# Altium PCB PCB1.PcbDoc
Units mil, origin at the board's own origin, x right, y up, seen from the top; angles counter-clockwise.
Board outline 1970 x 2514.84 mil, 2 copper layers (Top Layer, Bottom Layer); 20 components, 11 nets, 47 pads, 1405 vias.
Unrouted connection lines stored in the file: 16.
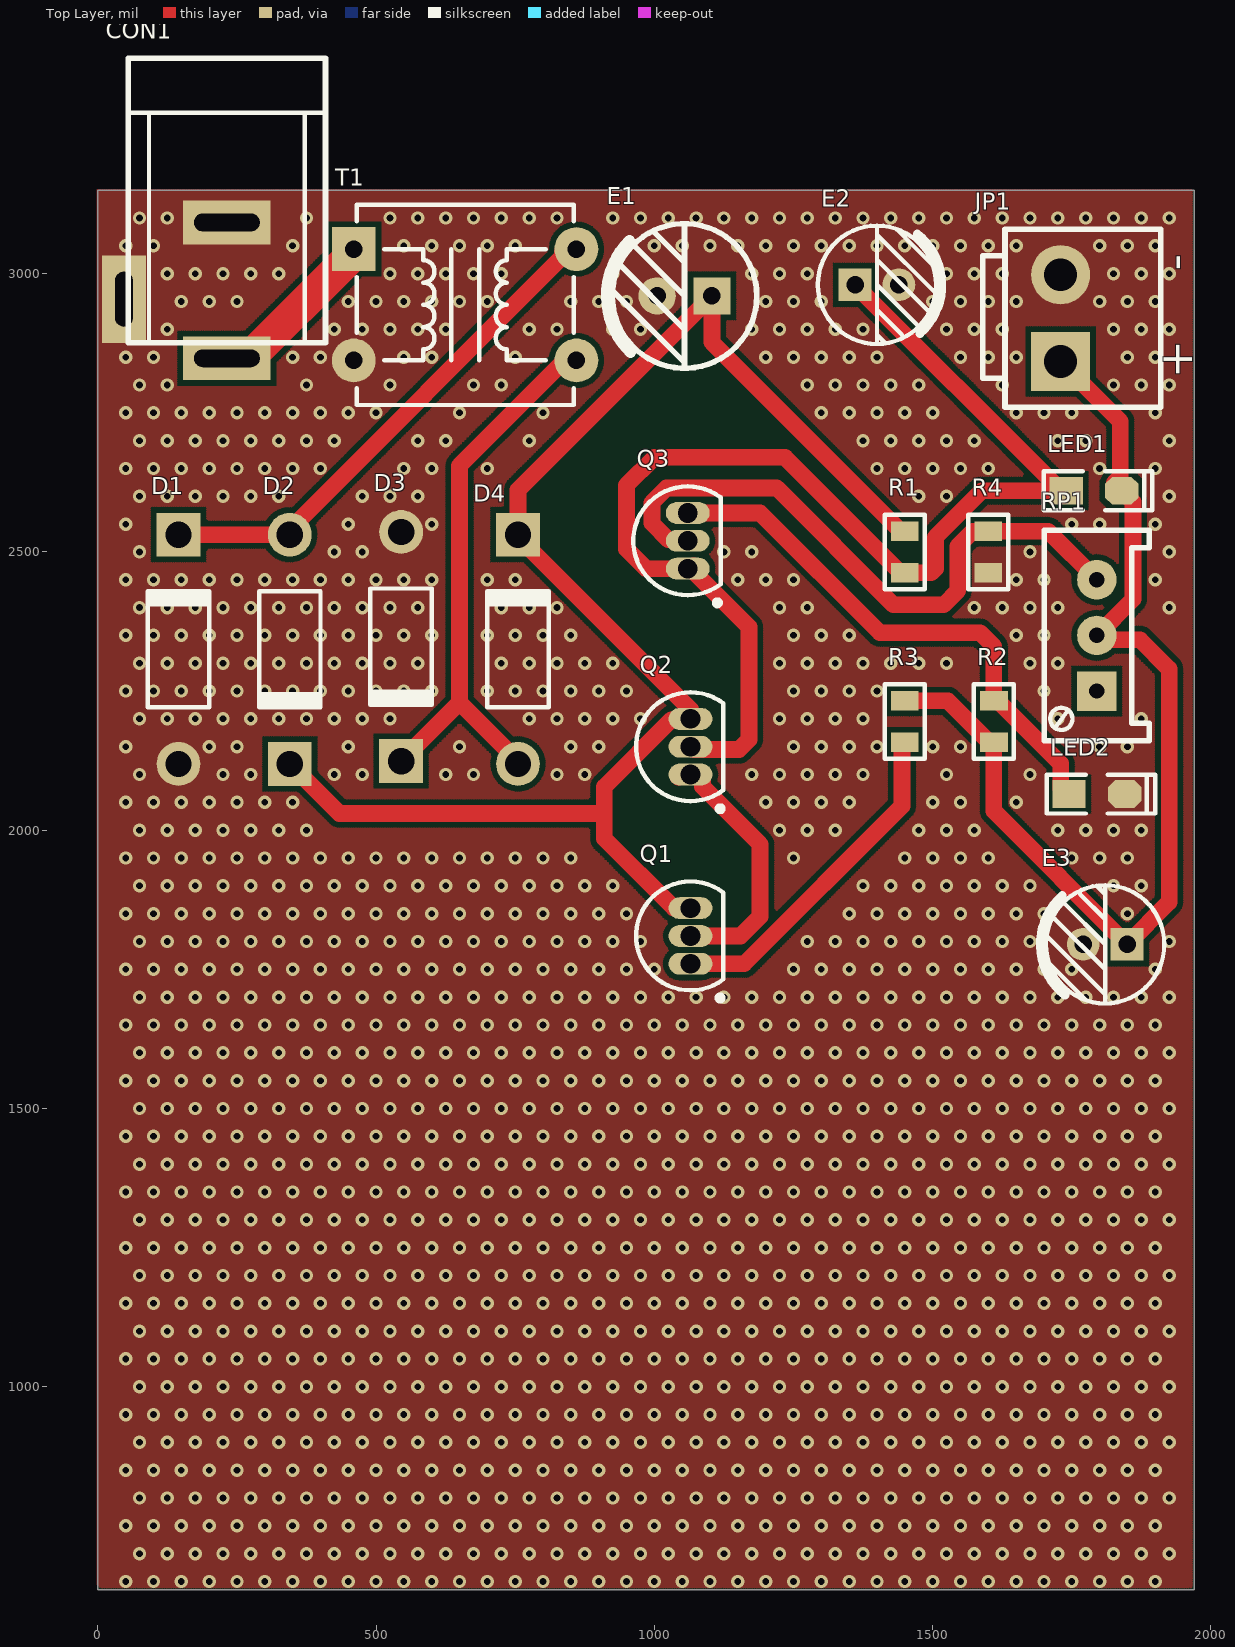
[diagram p0: Top Layer view]
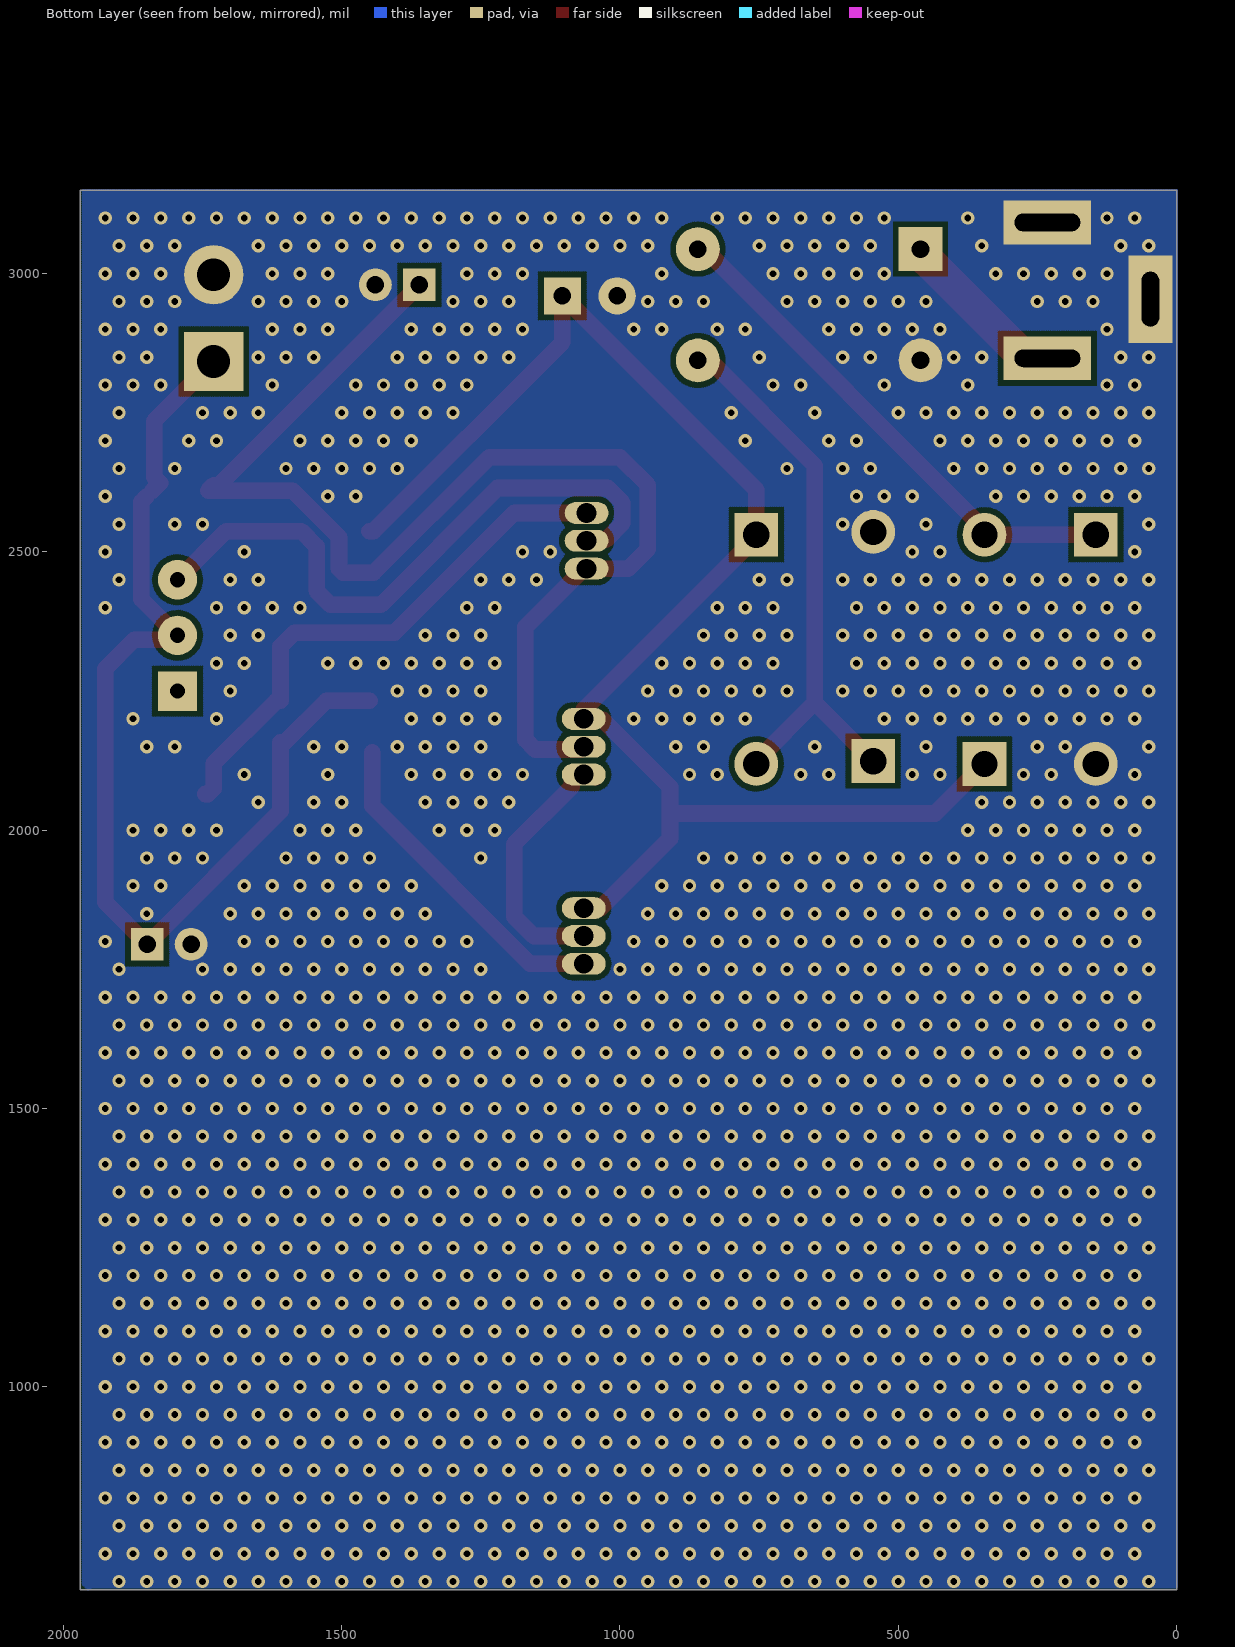
[diagram p1: Bottom Layer view, seen from below]
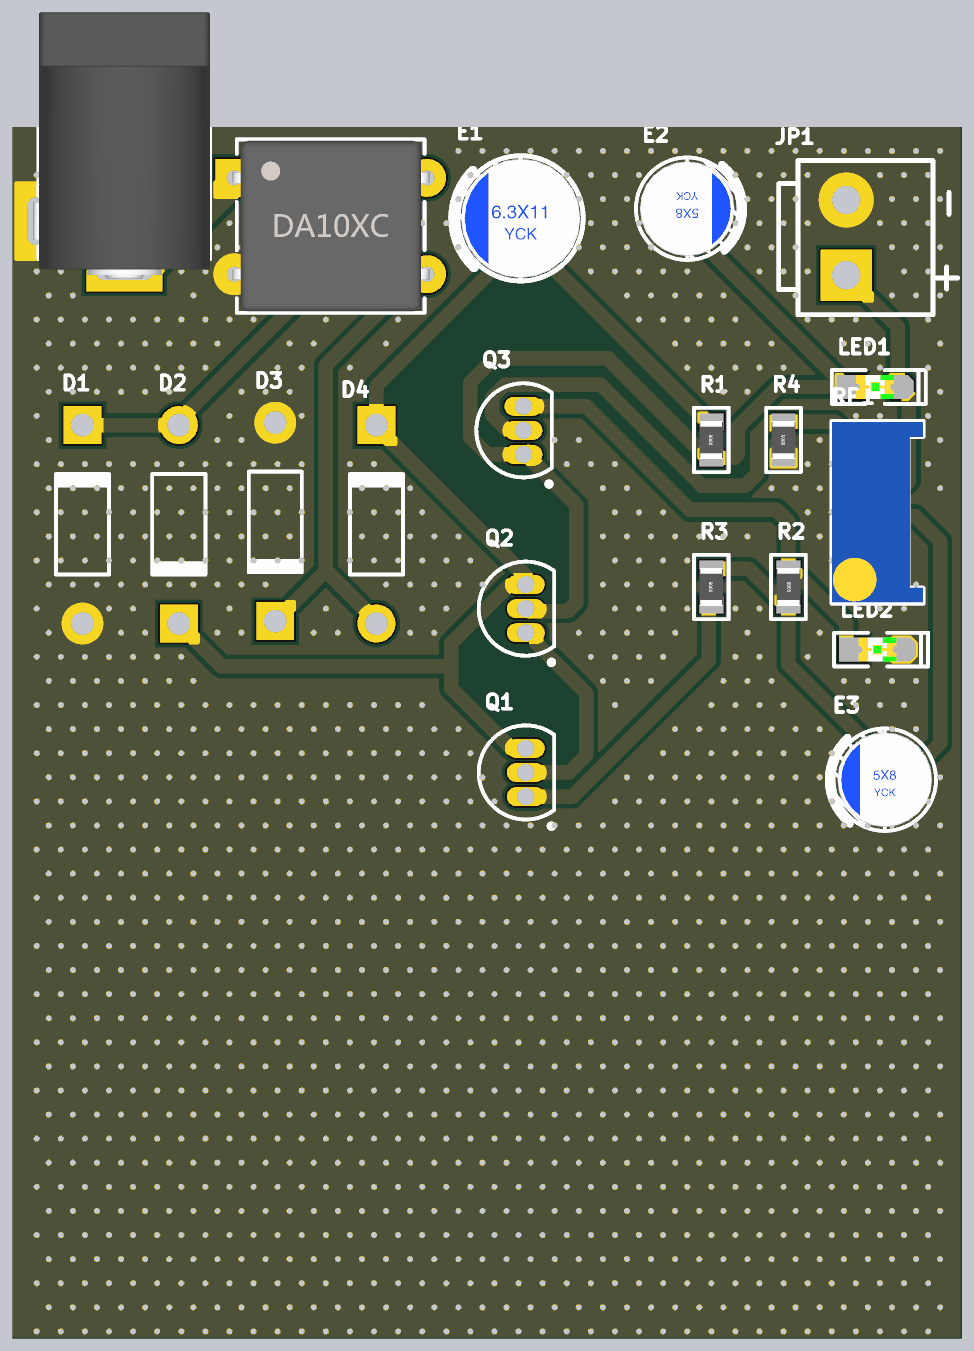
[diagram p2: 3D render of the assembled board from above, using the file's embedded part models]

## Layer stack, top to bottom
Top Solder: solder mask 0.4, Solder Resist, Dk 3.5
Top Layer: signal copper 1.4
Dielectric 1: dielectric 12.6, FR-4, Dk 4.8
Bottom Layer: signal copper 1.4
Bottom Solder: solder mask 0.4, Solder Resist, Dk 3.5

## Board outline
0,635 0,3149.84 1970,3149.84 1970,640 1970,635

## Design rules (kind name [scope] priority, off if disabled: settings)
Clearance "Stitching GND" [IsStitchingVia and InNet('GND') vs (IsVia and (Not IsStitchingVia)) Or IsPad] p1: gap=5 ignorepadtopadclearanceinfootprint=FALSE
Clearance [All] p2: gap=10 ignorepadtopadclearanceinfootprint=FALSE except(0: Arc-Hole Track-Hole SMDPad-Hole THPad-Hole Via-Hole Fill-Hole Poly-Hole Region-Hole Text-Hole)
PolygonConnect [All] p1: connectstyle=Direct reliefconductorwidth=10 reliefentries=4 polygonreliefangle="90 Angle" airgapwidth=10
RoutingVias [All] p1: holewidth=24 width=50 viastyle="Through Hole" minholewidth=24 minwidth=50 maxholewidth=24 maxwidth=50
SolderMaskExpansion [All] p1: expansion=4
Width Width_1 [All] p1: maxlimit=30 minlimit=30 preferedwidth=30
Width PWR [InNetClass('PWR')] p2: maxlimit=60 minlimit=60 preferedwidth=60
30 further rules are at their usual default settings.

## Classes and differential pairs
net class PWR: GND NetCON1_1 NetE3_1
component class Sheet1: CON1

## Components (designator, comment, footprint, x,y, rotation, side; value= is the part's Value field where it differs from the comment)
CON1 "3.5*1.3" DC-005 232,3092 r90 top
D1 "1N4007" DO-41 145,2325 r90 top
D2 "1N4007" DO-41 345,2325 r270 top
D3 "1N4007" DO-41 545,2330 r270 top
D4 "1N4007" DO-41 755,2325 r90 top
E1 "470uF/6.3V" "CS 2.5*6.3*11 - C" 1054.21,2960 r0 top
E2 "22uF/6.3V" "CS 2.0*5*8 - C" 1400,2980 r180 top
E3 "10uF/6.3V" "CS 2.0*5*8 - C" 1810,1795 r0 top
JP1 "HDR-1X2" VH3.96-LI-2P 1730,2920 r90 top
LED1 "红色" "LED 0805R" 1790,2610 r0 top
LED2 "蓝色" "LED 0805B" 1795,2065 r0 top
Q1 "2N5551" TO-92A 1065,1810 r0 top
Q2 "2N2222A" TO-92A 1065,2150 r0 top
Q3 "2N2222A" TO-92A 1060,2520 r0 top
R1 "1K" "R 0805_L" 1450,2500 r90 top
R2 "1K" "R 0805_L" 1610,2195 r270 top
R3 "1" "R 0805_L" 1450,2195 r90 top
R4 "240" "R 0805_L" 1600,2500 r90 top
RP1 "1K" 3296W 1795,2350 r90 top
T1 "DA101C" DA10XC 660,2944 r0 top

## Footprints (in the part's own frame and the unit in brackets; to place one, negate y for a bottom-side part, rotate by r counter-clockwise, add the part's x,y. Pads: shape width x height; smd on the part's side, far side on the other; paste and mask are expansions set on the pad)
3296W [mm] "Precise Multi-Winding Adjustable Resistor"
  rect 1.8x1.8 hole 0.7: 1(-2.54,0)
  round 1.8 hole 0.7: 2(0,0) 3(2.54,0)
  silkscreen extent -4.8,-2.4 4.8,2.4, body extent -4.75,-2.4 4.75,2.4, height 11.52
"CS 2.0*5*8 - C" [mm] "脚距2mm , 直径5mm , 高8mm"
  rect 1.5x1.5 hole 0.8: 1(1,0)
  round 1.5 hole 0.8: 2(-1,0)
  silkscreen extent -2.96,-2.7 2.7,2.7, body extent -2.5,-2.5 2.5,2.5, height 8.02
"CS 2.5*6.3*11 - C" [mm] "脚距2.5mm , 直径6.3mm , 高11mm"
  rect 1.7x1.7 hole 0.8: 1(1.25,0)
  round 1.7 hole 0.8: 2(-1.25,0)
  silkscreen extent -3.56,-3.3 3.3,3.3, body extent -3.15,-3.15 3.15,3.15, height 11.02
DA10XC [mm] "9mm*9.52mm*6.35mm(长*宽*高)"
  rect 2x2 hole 0.8 unplated: 1(-5.08,2.54)
  round 2 hole 0.8: 3(-5.08,-2.54) 4(5.08,-2.54) 6(5.08,2.54)
  silkscreen extent -4.95,-4.57 4.95,4.57, body extent -5.2,-4.5 5.21,4.5, height 6.4
DC-005 [mm] "5.5*2.1mm，DC30V,2.5A"
  rect 2x4 hole 0.8 slot 3 at 90 deg: 1(-6.2,0) 2(0,0)
  rect 4x2 hole 0.8 slot 2.5 at 0 deg: 3(-3.5,4.7)
  silkscreen extent -5.48,-4.5 7.5,4.5, body extent -6.55,-4.5 7.5,4.8, height 11.2
DO-41 [mm] "Diode, Axial; Body 5.2 x 2.7 mm (LxDia. max), Lead Dia. 0.86 mm (max)"
  round 2 hole 1.2: 1(-5.23,0)
  rect 2x2 hole 1.2: 2(5.23,0)
  silkscreen extent -2.65,-1.4 2.75,1.4
"LED 0805B" [mil] "蓝色0805LED"
  rect 60x50 smd: 1(-50,0)
  oct 60x50 smd: 2(50,0)
  silkscreen extent -90,-35 105,35, body extent -39,-25 39,25, height 32
"LED 0805R" [mil] "红色0805LED"
  rect 60x50 smd: 1(-50,0)
  oct 60x50 smd: 2(50,0)
  silkscreen extent -90,-35 105,35, body extent -39,-25 39,25, height 32
"R 0805_L" [mil] "1/8W贴片电阻"
  rect 35x50 smd: 1(-37.4,0) 2(37.4,0)
  silkscreen extent -67,-36 67,36, body extent -39,-25 39,25, height 20
TO-92A [mm] "TO, Flat Index; 3 In-Line, Axial Leads; Body Dia. 4.5mm; Leads 0.51 x 0.48 mm (max)"
  oval 2x1 hole 0.9: 1(0,-1.27) 2(0,0) 3(0,1.27)
  silkscreen extent -2.48,-2.95 1.5,2.48, body extent -2.48,-2.5 1.5,2.5, height 6.86
VH3.96-LI-2P [mm] "接插件，25V/5A"
  rect 2.7x2.7 hole 1.5: 1(-1.98,0)
  round 2.7 hole 1.5: 2(1.982,0)
  silkscreen extent -4.06,-4.57 4.07,3.56, body extent -3.98,-4.4 4.03,4.16, height 10.5

## Part data
CON1: library part P-DC, "低压电源接口", BOM名称=D, 学习资源=ww
D1 D2 D3 D4: "整流二极管", 学习资源=ww
E1 E2 E3: library part C-CS, "直插固态电容"
JP1: library part "Header 2", "2P接插件", 学习资源=ww
LED1 LED2: library part LED-SMD, "贴片LED", 学习资源=ww
Q1 Q2 Q3: library part 2N3904, "NPN General Purpose Amplifier", ComponentLink1Description="Manufacturer Link", ComponentLink1URL=http://www.fairchildsemi.com/, ComponentLink2Description=Datasheet, ComponentLink2URL=http://www.fairchildsemi.com/ds/2N%2F2N3904.pdf, DatasheetVersion=1997, LatestRevisionDate=15-Jan-2003, LatestRevisionNote="PCB Footprint 'BCY-W3/D4.7' replaced", PackageDescription="TO, Flat Index; 3 In-Line, Axial Leads; Body Dia. 4.5mm; Leads 0.51 x 0.48 mm (max)", PackageReference=TO-92A, PackageVersion=Sep-1998, Published=8-Jun-2000, Publisher="Altium Limited"
R1 R2 R3 R4: library part R, "贴片电阻"
RP1: library part RP, "单联电位器"
T1: library part DA10XC, "数字隔离变压器", 学习资源=ww

## Via types
v1: diameter 24, hole 12, Top Layer to Bottom Layer, tented both sides, 1405 vias

## Nets (pads, with @x,y where several pads share a name; then routed paths per layer and width w, separated by ;. In a path a pad name is that pad's centre, name@x,y a point inside that pad or via, vN(x,y) a via of type N, cw(c..) or ccw(c..) an arc to the next point about the centre after c; other vN are vias at no path point)
GND: CON1.2 CON1.3 D1.1 D3.1 E1.2 E2.2 E3.2 JP1.2 LED2.2 R4.1 T1.3
  other v1: 50,650 100,650 150,650 200,650 250,650 300,650 350,650 400,650 450,650 500,650 550,650 600,650 650,650 700,650 750,650 800,650 850,650 900,650 950,650 1000,650 1050,650 1100,650 1150,650 1200,650 1250,650 1300,650 1350,650 1400,650 1450,650 1500,650 1550,650 1600,650 1650,650 1700,650 1750,650 1800,650 1850,650 1900,650 75,700 125,700 175,700 225,700 275,700 325,700 375,700 425,700 475,700 525,700 575,700 625,700 675,700 725,700 775,700 825,700 875,700 925,700 975,700 1025,700 1075,700 1125,700 1175,700 1225,700 1275,700 1325,700 1375,700 1425,700 1475,700 1525,700 1575,700 1625,700 1675,700 1725,700 1775,700 1825,700 1875,700 1925,700 50,750 100,750 150,750 200,750 250,750 300,750 350,750 400,750 450,750 500,750 550,750 600,750 650,750 700,750 750,750 800,750 850,750 900,750 950,750 1000,750 1050,750 1100,750 1150,750 1200,750 1250,750 1300,750 1350,750 1400,750 1450,750 1500,750 1550,750 1600,750 1650,750 1700,750 1750,750 1800,750 1850,750 1900,750 75,800 125,800 175,800 225,800 275,800 325,800 375,800 425,800 475,800 525,800 575,800 625,800 675,800 725,800 775,800 825,800 875,800 925,800 975,800 1025,800 1075,800 1125,800 1175,800 1225,800 1275,800 1325,800 1375,800 1425,800 1475,800 1525,800 1575,800 1625,800 1675,800 1725,800 1775,800 1825,800 1875,800 1925,800 50,850 100,850 150,850 200,850 250,850 300,850 350,850 400,850 450,850 500,850 550,850 600,850 650,850 700,850 750,850 800,850 850,850 900,850 950,850 1000,850 1050,850 1100,850 1150,850 1200,850 1250,850 1300,850 1350,850 1400,850 1450,850 1500,850 1550,850 1600,850 1650,850 1700,850 1750,850 1800,850 1850,850 1900,850 75,900 125,900 175,900 225,900 275,900 325,900 375,900 425,900 475,900 525,900 575,900 625,900 675,900 725,900 775,900 825,900 875,900 925,900 975,900 1025,900 1075,900 1125,900 1175,900 1225,900 1275,900 1325,900 1375,900 1425,900 1475,900 1525,900 1575,900 1625,900 1675,900 1725,900 1775,900 1825,900 1875,900 1925,900 50,950 100,950 150,950 200,950 250,950 300,950 350,950 400,950 450,950 500,950 550,950 600,950 650,950 700,950 750,950 800,950 850,950 900,950 950,950 1000,950 1050,950 1100,950 1150,950 1200,950 1250,950 1300,950 1350,950 1400,950 1450,950 1500,950 1550,950 1600,950 1650,950 1700,950 1750,950 1800,950 1850,950 1900,950 75,1000 125,1000 175,1000 225,1000 275,1000 325,1000 375,1000 425,1000 475,1000 525,1000 575,1000 625,1000 675,1000 725,1000 775,1000 825,1000 875,1000 925,1000 975,1000 1025,1000 1075,1000 1125,1000 1175,1000 1225,1000 1275,1000 1325,1000 1375,1000 1425,1000 1475,1000 1525,1000 1575,1000 1625,1000 1675,1000 1725,1000 1775,1000 1825,1000 1875,1000 1925,1000 50,1050 100,1050 150,1050 200,1050 250,1050 300,1050 350,1050 400,1050 450,1050 500,1050 550,1050 600,1050 650,1050 700,1050 750,1050 800,1050 850,1050 900,1050 950,1050 1000,1050 1050,1050 1100,1050 1150,1050 1200,1050 1250,1050 1300,1050 1350,1050 1400,1050 1450,1050 1500,1050 1550,1050 1600,1050 1650,1050 1700,1050 1750,1050 1800,1050 1850,1050 1900,1050 75,1100 125,1100 175,1100 225,1100 275,1100 325,1100 375,1100 425,1100 475,1100 525,1100 575,1100 625,1100 675,1100 725,1100 775,1100 825,1100 875,1100 925,1100 975,1100 1025,1100 1075,1100 1125,1100 1175,1100 1225,1100 1275,1100 1325,1100 1375,1100 1425,1100 1475,1100 1525,1100 1575,1100 1625,1100 1675,1100 1725,1100 1775,1100 1825,1100 1875,1100 1925,1100 50,1150 100,1150 150,1150 200,1150 250,1150 300,1150 350,1150 400,1150 450,1150 500,1150 550,1150 600,1150 650,1150 700,1150 750,1150 800,1150 850,1150 900,1150 950,1150 1000,1150 1050,1150 1100,1150 1150,1150 1200,1150 1250,1150 1300,1150 1350,1150 1400,1150 1450,1150 1500,1150 1550,1150 1600,1150 1650,1150 1700,1150 1750,1150 1800,1150 1850,1150 1900,1150 75,1200 125,1200 175,1200 225,1200 275,1200 325,1200 375,1200 425,1200 475,1200 525,1200 575,1200 625,1200 675,1200 725,1200 775,1200 825,1200 875,1200 925,1200 975,1200 1025,1200 1075,1200 1125,1200 1175,1200 1225,1200 1275,1200 1325,1200 1375,1200 1425,1200 1475,1200 1525,1200 1575,1200 1625,1200 1675,1200 1725,1200 1775,1200 1825,1200 1875,1200 1925,1200 50,1250 100,1250 150,1250 200,1250 250,1250 300,1250 350,1250 400,1250 450,1250 500,1250 550,1250 600,1250 650,1250 700,1250 750,1250 800,1250 850,1250 900,1250 950,1250 1000,1250 1050,1250 1100,1250 1150,1250 1200,1250 1250,1250 1300,1250 1350,1250 1400,1250 1450,1250 1500,1250 1550,1250 1600,1250 1650,1250 1700,1250 1750,1250 1800,1250 1850,1250 1900,1250 75,1300 125,1300 175,1300 225,1300 275,1300 325,1300 375,1300 425,1300 475,1300 525,1300 575,1300 625,1300 675,1300 725,1300 775,1300 825,1300 875,1300 925,1300 975,1300 1025,1300 1075,1300 1125,1300 1175,1300 1225,1300 1275,1300 1325,1300 1375,1300 1425,1300 1475,1300 1525,1300 1575,1300 1625,1300 1675,1300 1725,1300 1775,1300 1825,1300 1875,1300 1925,1300 50,1350 100,1350 150,1350 200,1350 250,1350 300,1350 350,1350 400,1350 450,1350 500,1350 550,1350 600,1350 650,1350 700,1350 750,1350 800,1350 850,1350 900,1350 950,1350 1000,1350 1050,1350 1100,1350 1150,1350 1200,1350 1250,1350 1300,1350 1350,1350 1400,1350 1450,1350 1500,1350 1550,1350 1600,1350 1650,1350 1700,1350 1750,1350 1800,1350 1850,1350 1900,1350 75,1400 125,1400 175,1400 225,1400 275,1400 325,1400 375,1400 425,1400 475,1400 525,1400 575,1400 625,1400 675,1400 725,1400 775,1400 825,1400 875,1400 925,1400 975,1400 1025,1400 1075,1400 1125,1400 1175,1400 1225,1400 1275,1400 1325,1400 1375,1400 1425,1400 1475,1400 1525,1400 1575,1400 1625,1400 1675,1400 1725,1400 1775,1400 1825,1400 1875,1400 1925,1400 50,1450 100,1450 150,1450 200,1450 250,1450 300,1450 350,1450 400,1450 450,1450 500,1450 550,1450 600,1450 650,1450 700,1450 750,1450 800,1450 850,1450 900,1450 950,1450 1000,1450 1050,1450 1100,1450 1150,1450 1200,1450 1250,1450 1300,1450 1350,1450 1400,1450 1450,1450 1500,1450 1550,1450 1600,1450 1650,1450 1700,1450 1750,1450 1800,1450 1850,1450 1900,1450 75,1500 125,1500 175,1500 225,1500 275,1500 325,1500 375,1500 425,1500 475,1500 525,1500 575,1500 625,1500 675,1500 725,1500 775,1500 825,1500 875,1500 925,1500 975,1500 1025,1500 1075,1500 1125,1500 1175,1500 1225,1500 1275,1500 1325,1500 1375,1500 1425,1500 1475,1500 1525,1500 1575,1500 1625,1500 1675,1500 1725,1500 1775,1500 1825,1500 1875,1500 1925,1500 50,1550 100,1550 150,1550 200,1550 250,1550 300,1550 350,1550 400,1550 450,1550 500,1550 550,1550 600,1550 650,1550 700,1550 750,1550 800,1550 850,1550 900,1550 950,1550 1000,1550 1050,1550 1100,1550 1150,1550 1200,1550 1250,1550 1300,1550 1350,1550 1400,1550 1450,1550 1500,1550 1550,1550 1600,1550 1650,1550 1700,1550 1750,1550 1800,1550 1850,1550 1900,1550 75,1600 125,1600 175,1600 225,1600 275,1600 325,1600 375,1600 425,1600 475,1600 525,1600 575,1600 625,1600 675,1600 725,1600 775,1600 825,1600 875,1600 925,1600 975,1600 1025,1600 1075,1600 1125,1600 1175,1600 1225,1600 1275,1600 1325,1600 1375,1600 1425,1600 1475,1600 1525,1600 1575,1600 1625,1600 1675,1600 1725,1600 1775,1600 1825,1600 1875,1600 1925,1600 50,1650 100,1650 150,1650 200,1650 250,1650 300,1650 350,1650 400,1650 450,1650 500,1650 550,1650 600,1650 650,1650 700,1650 750,1650 800,1650 850,1650 900,1650 950,1650 1000,1650 1050,1650 1100,1650 1150,1650 1200,1650 1250,1650 1300,1650 1350,1650 1400,1650 1450,1650 1500,1650 1550,1650 1600,1650 1650,1650 1700,1650 1750,1650 1800,1650 1850,1650 1900,1650 75,1700 125,1700 175,1700 225,1700 275,1700 325,1700 375,1700 425,1700 475,1700 525,1700 575,1700 625,1700 675,1700 725,1700 775,1700 825,1700 875,1700 925,1700 975,1700 1025,1700 1075,1700 1125,1700 1175,1700 1225,1700 1275,1700 1325,1700 1375,1700 1425,1700 1475,1700 1525,1700 1575,1700 1625,1700 1675,1700 1725,1700 1775,1700 1825,1700 1875,1700 1925,1700 50,1750 100,1750 150,1750 200,1750 250,1750 300,1750 350,1750 400,1750 450,1750 500,1750 550,1750 600,1750 650,1750 700,1750 750,1750 800,1750 850,1750 900,1750 950,1750 1000,1750 1250,1750 1300,1750 1350,1750 1400,1750 1450,1750 1500,1750 1550,1750 1600,1750 1650,1750 1700,1750 1750,1750 1900,1750 75,1800 125,1800 175,1800 225,1800 275,1800 325,1800 375,1800 425,1800 475,1800 525,1800 575,1800 625,1800 675,1800 725,1800 775,1800 825,1800 875,1800 925,1800 975,1800 1275,1800 1325,1800 1375,1800 1425,1800 1475,1800 1525,1800 1575,1800 1625,1800 1675,1800 1925,1800 50,1850 100,1850 150,1850 200,1850 250,1850 300,1850 350,1850 400,1850 450,1850 500,1850 550,1850 600,1850 650,1850 700,1850 750,1850 800,1850 850,1850 900,1850 950,1850 1350,1850 1400,1850 1450,1850 1500,1850 1550,1850 1600,1850 1650,1850 1700,1850 1850,1850 75,1900 125,1900 175,1900 225,1900 275,1900 325,1900 375,1900 425,1900 475,1900 525,1900 575,1900 625,1900 675,1900 725,1900 775,1900 825,1900 875,1900 925,1900 1375,1900 1425,1900 1475,1900 1525,1900 1575,1900 1625,1900 1675,1900 1825,1900 1875,1900 50,1950 100,1950 150,1950 200,1950 250,1950 300,1950 350,1950 400,1950 450,1950 500,1950 550,1950 600,1950 650,1950 700,1950 750,1950 800,1950 850,1950 1250,1950 1450,1950 1500,1950 1550,1950 1600,1950 1750,1950 1800,1950 1850,1950 75,2000 125,2000 175,2000 225,2000 275,2000 325,2000 375,2000 1225,2000 1275,2000 1325,2000 1475,2000 1525,2000 1575,2000 1725,2000 1775,2000 1825,2000 1875,2000 50,2050 100,2050 150,2050 200,2050 250,2050 300,2050 350,2050 1200,2050 1250,2050 1300,2050 1350,2050 1500,2050 1550,2050 1650,2050 75,2100 225,2100 275,2100 425,2100 475,2100 625,2100 675,2100 825,2100 875,2100 1175,2100 1225,2100 1275,2100 1325,2100 1375,2100 1525,2100 1675,2100 50,2150 200,2150 250,2150 450,2150 650,2150 850,2150 900,2150 1250,2150 1300,2150 1350,2150 1400,2150 1500,2150 1550,2150 1800,2150 1850,2150 75,2200 125,2200 175,2200 225,2200 275,2200 325,2200 375,2200 425,2200 475,2200 525,2200 775,2200 825,2200 875,2200 925,2200 975,2200 1225,2200 1275,2200 1325,2200 1375,2200 1725,2200 1875,2200 50,2250 100,2250 150,2250 200,2250 250,2250 300,2250 350,2250 400,2250 450,2250 500,2250 550,2250 600,2250 700,2250 750,2250 800,2250 850,2250 900,2250 950,2250 1250,2250 1300,2250 1350,2250 1400,2250 1700,2250 75,2300 125,2300 175,2300 225,2300 275,2300 325,2300 375,2300 425,2300 475,2300 525,2300 575,2300 725,2300 775,2300 825,2300 875,2300 925,2300 1225,2300 1275,2300 1325,2300 1375,2300 1425,2300 1475,2300 1525,2300 1675,2300 1725,2300 50,2350 100,2350 150,2350 200,2350 250,2350 300,2350 350,2350 400,2350 450,2350 500,2350 550,2350 600,2350 700,2350 750,2350 800,2350 850,2350 1250,2350 1300,2350 1350,2350 1650,2350 1700,2350 75,2400 125,2400 175,2400 225,2400 275,2400 325,2400 375,2400 425,2400 475,2400 525,2400 575,2400 725,2400 775,2400 825,2400 1225,2400 1275,2400 1575,2400 1625,2400 1675,2400 1725,2400 1925,2400 50,2450 100,2450 150,2450 200,2450 250,2450 300,2450 350,2450 400,2450 450,2450 500,2450 550,2450 600,2450 700,2450 750,2450 1150,2450 1200,2450 1250,2450 1650,2450 1700,2450 1900,2450 75,2500 425,2500 475,2500 1125,2500 1175,2500 1675,2500 1925,2500 50,2550 450,2550 600,2550 1750,2550 1800,2550 1900,2550 75,2600 125,2600 175,2600 225,2600 275,2600 325,2600 475,2600 525,2600 575,2600 1475,2600 1525,2600 1925,2600 50,2650 100,2650 150,2650 200,2650 250,2650 300,2650 350,2650 400,2650 550,2650 600,2650 700,2650 1400,2650 1450,2650 1500,2650 1550,2650 1600,2650 1800,2650 1900,2650 75,2700 125,2700 175,2700 225,2700 275,2700 325,2700 375,2700 425,2700 575,2700 625,2700 775,2700 1375,2700 1425,2700 1475,2700 1525,2700 1575,2700 1725,2700 1775,2700 1925,2700 50,2750 100,2750 150,2750 200,2750 250,2750 300,2750 350,2750 400,2750 450,2750 500,2750 650,2750 800,2750 1300,2750 1350,2750 1400,2750 1450,2750 1500,2750 1650,2750 1700,2750 1750,2750 1900,2750 75,2800 125,2800 375,2800 525,2800 675,2800 725,2800 1275,2800 1325,2800 1375,2800 1425,2800 1475,2800 1625,2800 1825,2800 1875,2800 1925,2800 50,2850 100,2850 350,2850 400,2850 550,2850 600,2850 750,2850 1200,2850 1250,2850 1300,2850 1350,2850 1400,2850 1550,2850 1600,2850 1650,2850 1850,2850 1900,2850 125,2900 425,2900 475,2900 525,2900 575,2900 625,2900 775,2900 825,2900 925,2900 975,2900 1175,2900 1225,2900 1275,2900 1325,2900 1375,2900 1525,2900 1575,2900 1625,2900 1825,2900 1875,2900 1925,2900 150,2950 200,2950 250,2950 450,2950 500,2950 550,2950 600,2950 650,2950 700,2950 850,2950 900,2950 950,2950 1200,2950 1250,2950 1300,2950 1500,2950 1550,2950 1600,2950 1650,2950 1800,2950 1850,2950 1900,2950 125,3000 175,3000 225,3000 275,3000 325,3000 525,3000 575,3000 625,3000 675,3000 725,3000 925,3000 1175,3000 1225,3000 1275,3000 1525,3000 1575,3000 1625,3000 1825,3000 1875,3000 1925,3000 50,3050 100,3050 350,3050 550,3050 600,3050 650,3050 700,3050 750,3050 950,3050 1000,3050 1050,3050 1100,3050 1150,3050 1200,3050 1250,3050 1300,3050 1350,3050 1400,3050 1450,3050 1500,3050 1550,3050 1600,3050 1650,3050 1800,3050 1850,3050 1900,3050 75,3100 125,3100 375,3100 525,3100 575,3100 625,3100 675,3100 725,3100 775,3100 825,3100 925,3100 975,3100 1025,3100 1075,3100 1125,3100 1175,3100 1225,3100 1275,3100 1325,3100 1375,3100 1425,3100 1475,3100 1525,3100 1575,3100 1625,3100 1675,3100 1725,3100 1775,3100 1825,3100 1875,3100 1925,3100
NetCON1_1: CON1.1 T1.1 | length 302.1
  Top Layer w30: CON1.1 CON1.1@271.37,2847.91 ; T1.1@447.63,3024.17 T1.1@447.63,3037.63
  Top Layer w60: CON1.1@271.37,2847.91 T1.1@447.63,3024.17
NetD1_2: D1.2 D2.1 T1.6 | length 912.1
  Top Layer w30: D1.2 D2.1 345,2540.45 835,3030.45 T1.6@835,3040
NetD2_2: D2.2 D4.2 E1.1 Q1.3 Q2.3 R1.2 | length 2693.3
  Top Layer w30: D2.2 434.09,2030 910,2030 ; Q1.3 1035,1860 910,1985 910,2030 ; Q2.3 1063.21,2198.21 1030.33,2198.21 910,2077.88 910,2030 ; Q2.3@1065,2217.15 755,2527.15 D4.2 755,2611.57 E1.1 1103.43,2876.48 1442.5,2537.4 R1.2
NetD3_2: D3.2 D4.1 T1.4 | length 989.5
  Top Layer w30: D3.2 650,2229.09 ; D4.1 755,2124.09 650,2229.09 ; T1.4@835,2840 650,2655 650,2229.09
NetE2_1: E2.1 LED1.1 Q2.2 Q3.1 R1.1 | length 2240.7
  Top Layer w30: Q2.2 1070,2145 1152.43,2145 1170,2162.57 1170,2365 Q3.1@1065,2470 ; Q3.1@1070.32,2475.32 Q3.1@1065,2470 ; E2.1 1720.63,2620 1730,2620 LED1.1 1588.43,2610 1505,2526.57 1505,2470 1497.6,2462.6 R1.1 1442.5,2462.6 1235.1,2670 1000,2670 950,2620 950,2505 985,2470 Q3.1 Q3.1@1065,2470
NetE3_1: E3.1 JP1.1 LED1.2 R2.2 R3.2 RP1.2 | length 1899.7
  Top Layer w30: R3.2 1527.7,2232.4 1602.5,2157.6 R2.2 1610,2034.37 E3.1 1925,1870.63 1925,2290 1872.82,2342.18 1802.82,2342.18 RP1.2 1860,2415 1860,2590 LED1.2@1851.29,2598.71 ; JP1.1 1837,2735.05 1837,2634.67 1826.16,2623.84 LED1.2
NetLED2_1: LED2.1 Q3.3 R2.1 | length 977.7
  Top Layer w30: Q3.3 1190,2570 1405,2355 1585,2355 1610,2330 R2.1 1617.5,2232.4 1730,2119.9 1730,2075 1740,2065 LED2.1
NetQ1_1: Q1.1 R3.1 | length 594
  Top Layer w30: Q1.1 1161.57,1760 1445,2043.43 1445,2140
NetQ1_2: Q1.2 Q2.1 | length 479.6
  Top Layer w30: Q2.1@1043.52,2095.67 1047.85,2100 Q2.1 1082.15,2100 1086.48,2095.67 1086.48,2078.52 1190,1975 1190,1845 1155,1810 Q1.2
NetQ3_2: Q3.2 R4.2 RP1.3 | length 1149.4
  Top Layer w30: Q3.2 1058.21,2521.79 1025.33,2521.79 995.63,2551.49 995.63,2588.51 1021.81,2614.68 1220.06,2614.68 1429.74,2405 1520,2405 1545,2430 1545,2510 1572.4,2537.4 R4.2 1707.6,2537.4 RP1.3
pads on no net: RP1.1

## Polygon pours and split planes (outlines as drawn)
GND on Bottom Layer "Bottom Layer-GND" (hatched 90Degree grid 4 track 5, remove dead copper, pour order 22): 0,3150 1965,3150 1965,645 1955,635 1950,640 0,640
GND on Top Layer "Top Layer-GND" (hatched 90Degree grid 4 track 5, remove dead copper, pour order 24): 0,3150 1965,3150 1965,640 5,640 0,645

## Silkscreen, mask and mechanical layers (free items; w line width, h text height)
Top Overlay:
  text "-" at 1920,3035 h60 r270
  text "+" at 1915,2880 h60 r270
Drill Drawing:
  lines w10: 1970,635 1482.5,635 497.5,635 0,635 0,3149.84 1970,3149.84 1970,640